# Altium PCB TSALLED.PcbDoc
Units mm, origin at the board's own origin, x right, y up, seen from the top; angles counter-clockwise.
Board outline 124.75 x 35.4 mm, 2 copper layers (Top Layer, Bottom Layer); 48 components, 39 nets, 174 pads, 7 vias.
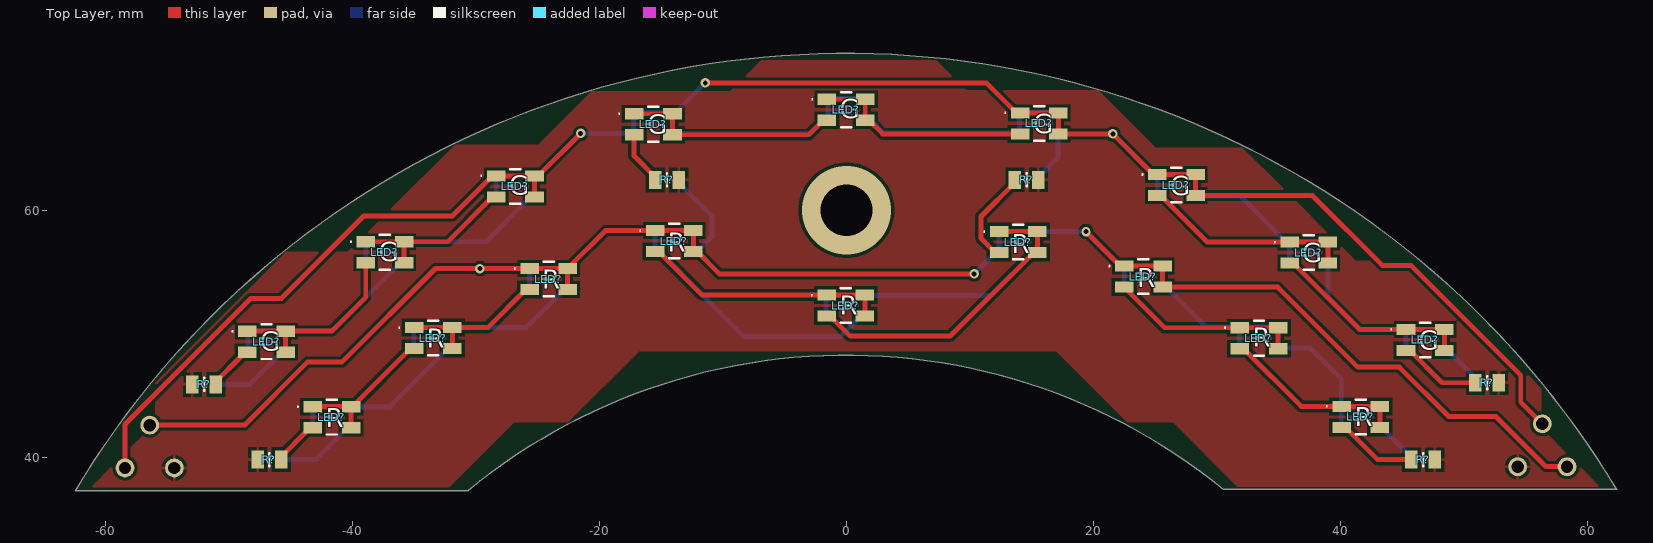
[diagram p0: Top Layer view]
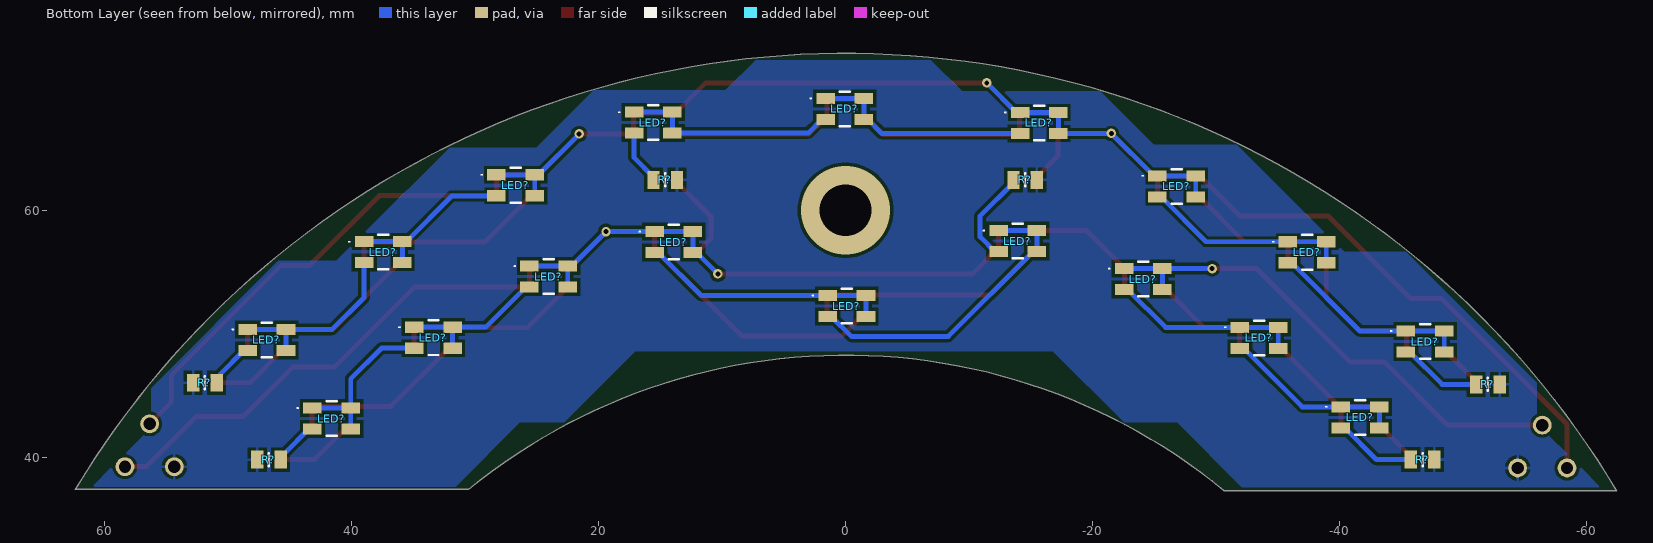
[diagram p1: Bottom Layer view, seen from below]
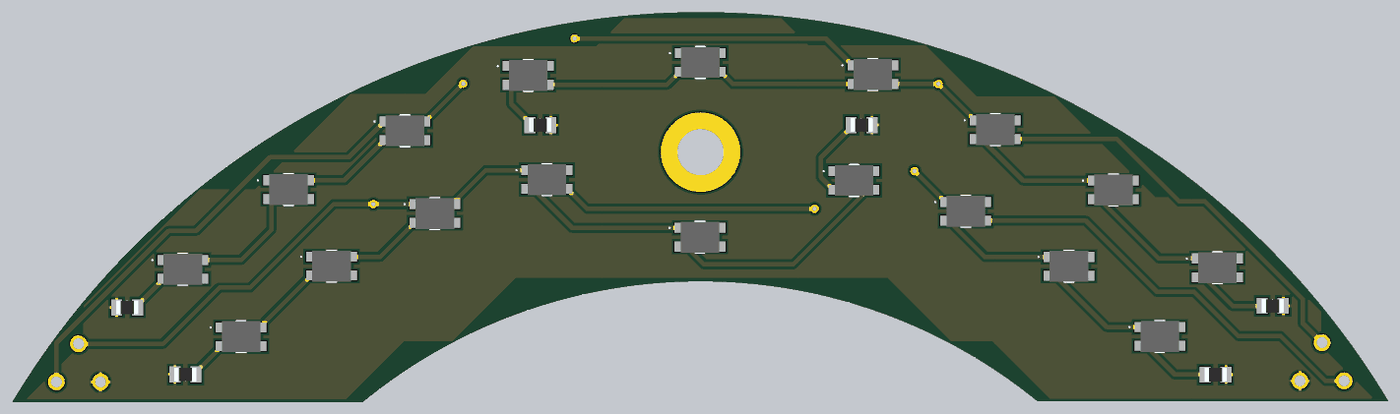
[diagram p2: 3D render of the assembled board from above, using the file's embedded part models]
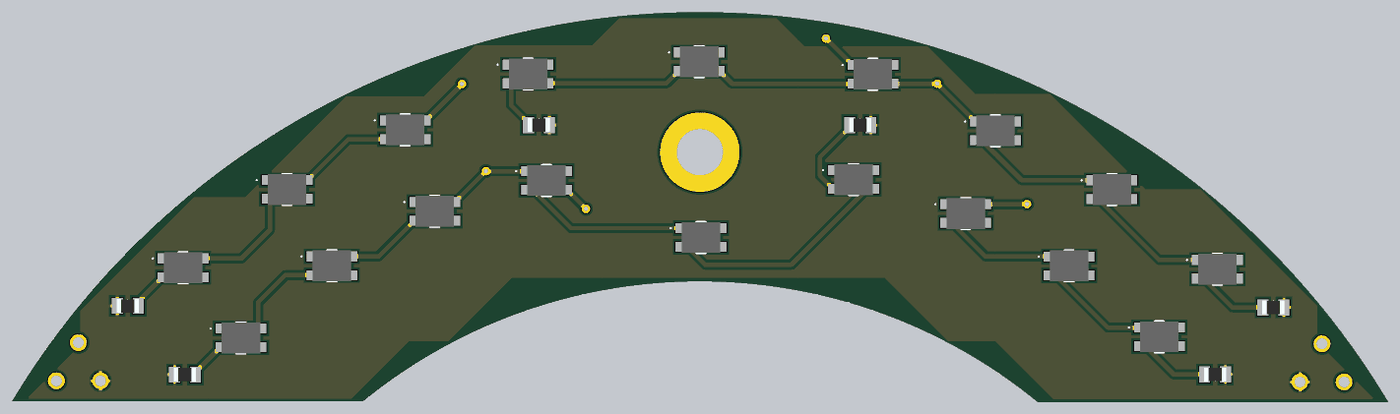
[diagram p3: 3D render of the assembled board from below, using the file's embedded part models]

## Layer stack, top to bottom
Top Solder: solder mask 0.0102, Solder Resist, Dk 3.5
Top Layer: signal copper 0.0356
Dielectric 1: dielectric 0.32, FR-4, Dk 4.8
Bottom Layer: signal copper 0.0356
Bottom Solder: solder mask 0.0102, Solder Resist, Dk 3.5

## Board outline
-62.405,37.295 cw(c0,0) 62.343,37.399 30.524,37.399 ccw(c0,0) -30.601,37.336 -30.601,37.295

## Design rules (kind name [scope] priority, off if disabled: settings)
Clearance Clearance_1 [All] p1: gap=0.254 ignorepadtopadclearanceinfootprint=FALSE except(0: Arc-Hole Track-Hole SMDPad-Hole THPad-Hole Via-Hole Fill-Hole Poly-Hole Region-Hole Text-Hole)
Clearance [All] p2: gap=0.254 ignorepadtopadclearanceinfootprint=FALSE except(0: Arc-Hole Track-Hole SMDPad-Hole THPad-Hole Via-Hole Fill-Hole Poly-Hole Region-Hole Text-Hole)
PolygonConnect [All] p1: connectstyle=Relief reliefconductorwidth=0.254 reliefentries=4 polygonreliefangle="90 Angle" airgapwidth=0.254
RoutingVias [All] p1: holewidth=0.711 width=1.27 viastyle="Through Hole" minholewidth=0.711 minwidth=1.27 maxholewidth=0.711 maxwidth=1.27
SolderMaskExpansion [All] p1: expansion=0.102 istentingtop=FALSE
Width [All] p1: maxlimit=0.4 minlimit=0.4 preferedwidth=0.4 minimp=50.000000 maximp=50.000000 favimp=50.000000
30 further rules are at their usual default settings.

## Classes and differential pairs
component class Sheet1: LED? R?

## Components (designator, comment, footprint, x,y, rotation, side; value= is the part's Value field where it differs from the comment)
LED? "150141RS63130" 150141RS63130 26.711,62.022 r270 bottom
LED? "150141RS63130" 150141RS63130 46.845,49.505 r270 bottom
LED? "150141RS63130" 150141RS63130 24.039,54.63 r270 bottom
LED? "150141RS63130" 150141RS63130 15.57,67.089 r270 bottom
LED? "150141RS63130" 150141RS63130 41.605,43.139 r270 bottom
LED? "150141RS63130" 150141RS63130 -24.097,54.43 r270 bottom
LED? "150141RS63130" 150141RS63130 -26.792,61.934 r270 bottom
LED? "150141RS63130" 150141RS63130 0.064,68.204 r270 bottom
LED? "150141RS63130" 150141RS63130 -15.674,67.066 r270 bottom
LED? "150141RS63130" 150141RS63130 -33.467,49.675 r270 bottom
LED? "150141RS63130" 150141RS63130 -46.906,49.375 r270 bottom
LED? "150141RS63130" 150141RS63130 -37.353,56.6 r270 bottom
LED? "150141RS63130" 150141RS63130 -41.646,43.236 r270 bottom
LED? "150141RS63130" 150141RS63130 -0.099,52.25 r270 bottom
LED? "150141RS63130" 150141RS63130 37.422,56.612 r270 bottom
LED? "150141RS63130" 150141RS63130 13.906,57.424 r270 bottom
LED? "150141RS63130" 150141RS63130 33.363,49.685 r270 bottom
LED? "150141RS63130" 150141RS63130 -13.931,57.507 r270 bottom
LED? "150141RS63130" 150141RS63130 -37.353,56.6 r270 top
LED? "150141RS63130" 150141RS63130 -13.931,57.507 r270 top
LED? "150141RS63130" 150141RS63130 26.711,62.038 r270 top
LED? "150141RS63130" 150141RS63130 13.906,57.424 r270 top
LED? "150141RS63130" 150141RS63130 -33.444,49.652 r270 top
LED? "150141RS63130" 150141RS63130 -0.022,68.134 r270 top
LED? "150141RS63130" 150141RS63130 -0.053,52.278 r270 top
LED? "150141RS63130" 150141RS63130 33.394,49.641 r270 top
LED? "150141RS63130" 150141RS63130 41.633,43.274 r270 top
LED? "150141RS63130" 150141RS63130 -15.625,66.96 r270 top
LED? "150141RS63130" 150141RS63130 37.421,56.567 r270 top
LED? "150141RS63130" 150141RS63130 -46.937,49.36 r270 top
LED? "150141RS63130" 150141RS63130 24.039,54.63 r270 top
LED? "150141RS63130" 150141RS63130 -41.646,43.249 r270 top
LED? "150141RS63130" 150141RS63130 -24.084,54.43 r270 top
LED? "150141RS63130" 150141RS63130 -26.795,61.934 r270 top
LED? "150141RS63130" 150141RS63130 15.611,67.031 r270 top
LED? "150141RS63130" 150141RS63130 46.845,49.505 r270 top
R? "CPF0805B100RE1" RESC2012X65N -46.695,39.822 r180 top
R? "CPF0805B100RE1" RESC2012X65N 14.587,62.459 r0 top
R? "CPF0805B100RE1" RESC2012X65N -14.519,62.456 r0 top
R? "CPF0805B100RE1" RESC2012X65N 51.859,46.04 r180 bottom
R? "CPF0805B100RE1" RESC2012X65N -51.984,45.903 r180 bottom
R? "CPF0805B100RE1" RESC2012X65N -51.984,45.903 r180 top
R? "CPF0805B100RE1" RESC2012X65N 51.859,46.04 r0 top
R? "CPF0805B100RE1" RESC2012X65N -46.695,39.822 r180 bottom
R? "CPF0805B100RE1" RESC2012X65N -14.534,62.456 r180 bottom
R? "CPF0805B100RE1" RESC2012X65N 14.597,62.459 r180 bottom
R? "CPF0805B100RE1" RESC2012X65N 46.678,39.812 r0 bottom
R? "CPF0805B100RE1" RESC2012X65N 46.678,39.812 r0 top

## Footprints (in the part's own frame and the unit in brackets; to place one, negate y for a bottom-side part, rotate by r counter-clockwise, add the part's x,y. Pads: shape width x height; smd on the part's side, far side on the other; paste and mask are expansions set on the pad)
150141RS63130 [mm]
  rect 0.9x1.5 smd: 1(-0.85,-1.55) 2(-0.85,1.55) 3(0.85,1.55) 4(0.85,-1.55)
  silkscreen extent -1.4,-2.8 1.4,0.4, body extent -1.4,-1.75 1.4,1.75, height 3.8
RESC2012X65N [mm]
  rect 1x1.45 smd: 1(-0.95,0) 2(0.95,0)
  silkscreen extent 0,-0.53 0,0.53, body extent -1,-0.63 1,0.63, height 0.65

## Part data
LED? LED? LED? LED? LED? LED? LED? LED? LED? LED? LED? LED? LED? LED? LED? LED? LED? LED? LED? LED? LED? LED? LED? LED? LED? LED? LED? LED? LED? LED? LED? LED? LED? LED? LED? LED?: "LED", Manufacturer_Name="Wurth Elektronik", Mouser Part Number=710-150141RS63130, Datasheet Link=https://www.we-online.com/components/products/datasheet/150141RS63130.pdf, Height=3.7mm, Manufacturer_Part_Number=150141RS63130, Mouser Price/Stock=https://www.mouser.co.uk/ProductDetail/Wurth-Elektronik/150141RS63130?qs=81r%252BiQLm7BRLV97EClEkBQ%3D%3D
R? R? R? R? R? R? R? R? R? R? R? R?: "Resistor", Manufacturer_Name="TE Connectivity", Mouser Part Number=279-CPF0805B100RE1, Arrow Part Number=CPF0805B100RE1, Arrow Price/Stock=https://www.arrow.com/en/products/cpf0805b100re1/te-connectivity?region=nac, Datasheet Link=https://datasheet.datasheetarchive.com/originals/distributors/DKDS-21/401696.pdf, Height=0.65mm, Manufacturer_Part_Number=CPF0805B100RE1, Mouser Price/Stock=https://www.mouser.co.uk/ProductDetail/TE-Connectivity-Holsworthy/CPF0805B100RE1?qs=9ylKvqdyudkCWLPT1QvLZQ%3D%3D

## Free pads (board coordinates)
  round 1.524 hole 1: 2(-54.392,39.142) 3(56.335,42.71) 4(54.333,39.243) G(-58.392,39.142) R(-56.389,42.609) r(58.333,39.243)

## Via types
v1: diameter 0.765, hole 0.4, Top Layer to Bottom Layer, 6 vias
v2: diameter 7.2, hole 4.2, Top Layer to Bottom Layer, 1 vias

## Nets (pads, with @x,y where several pads share a name; then routed paths per layer and width w, separated by ;. In a path a pad name is that pad's centre, name@x,y a point inside that pad or via, vN(x,y) a via of type N, cw(c..) or ccw(c..) an arc to the next point about the centre after c; other vN are vias at no path point)
0: LED?.1@48.395,50.355 LED?.2@45.295,50.355 LED?.3@45.295,48.655 LED?.4@38.972,55.762 | length 15
  Bottom Layer w0.4: LED?.4@38.972,55.762 38.972,52.933 41.55,50.355 LED?.2@45.295,50.355 ; LED?.3@45.295,48.655 LED?.2@45.295,50.355 ; LED?.1@48.395,50.355 LED?.2@45.295,50.355
1: LED?.1@38.972,57.462 LED?.2@35.872,57.462 LED?.3@35.872,55.762 LED?.4@28.261,61.172 | length 14
  Bottom Layer w0.4: LED?.4@28.217,61.172 31.862,61.172 35.572,57.462 LED?.2@35.872,57.462 ; LED?.3@35.872,55.762 LED?.2@35.872,57.462 ; LED?.1@38.972,57.462 LED?.2@35.872,57.462
2: LED?.1@43.155,43.989 LED?.2@40.055,43.989 LED?.3@40.055,42.289 LED?.4@34.913,48.835 | length 13.3
  Bottom Layer w0.4: LED?.4@34.913,48.835 37.568,48.835 40.055,46.348 LED?.2@40.055,43.989 ; LED?.3@40.055,42.289 LED?.2@40.055,43.989 ; LED?.1@43.155,43.989 LED?.2@40.055,43.989
3: LED?.1@34.913,50.535 LED?.2@31.813,50.535 LED?.3@31.813,48.835 LED?.4@25.589,53.78 | length 12.4
  Bottom Layer w0.4: LED?.4@25.589,53.78 25.889,53.78 29.134,50.535 LED?.2@31.813,50.535 ; LED?.3@31.813,48.835 LED?.2@31.813,50.535 ; LED?.1@34.913,50.535 LED?.2@31.813,50.535
6: LED?.1@17.12,67.939 LED?.2@14.02,67.939 LED?.3@14.02,66.239 LED?.4@1.613,67.354 | length 17.7
  Bottom Layer w0.4: LED?.4@1.613,67.354 1.913,67.354 3.029,66.239 14.02,66.239 14.02,67.939 LED?.1@17.12,67.939
7: LED?.1@1.613,69.054 LED?.2@-1.486,69.054 LED?.3@-1.486,67.354 LED?.4@-14.124,66.216 | length 17.9
  Bottom Layer w0.4: LED?.4@-14.124,66.216 -2.924,66.216 -1.786,67.354 -1.486,67.354 -1.486,69.054 LED?.1@1.613,69.054
8: LED?.1@-35.803,57.45 LED?.2@-38.903,57.45 LED?.3@-38.903,55.75 LED?.4@-25.242,61.084 | length 16.9
  Bottom Layer w0.4: LED?.3@-38.903,55.75 -38.903,57.45 -35.803,57.45 -29.175,57.45 -25.542,61.084 LED?.4@-25.242,61.084
9: LED?.1@-45.356,50.225 LED?.2@-48.456,50.225 LED?.3@-48.456,48.525 LED?.4@-35.803,55.75 | length 16.6
  Bottom Layer w0.4: LED?.3@-48.456,48.525 -48.456,50.225 -45.356,50.225 -41.628,50.225 -36.103,55.75 LED?.4@-35.803,55.75
10: LED?.1@-12.381,58.357 LED?.2@-15.481,58.357 LED?.3@-15.481,56.657 LED?.4@1.451,51.4 | length 25.2
  Bottom Layer w0.4: LED?.1@-12.381,58.357 -15.481,58.357 -15.481,56.657 -15.181,56.657 -8.313,49.789 -0.46,49.789 1.151,51.4 LED?.4@1.451,51.4
11: LED?.1@1.451,53.1 LED?.2@-1.649,53.1 LED?.3@-1.649,51.4 LED?.4@15.456,56.574 | length 20.2
  Bottom Layer w0.4: LED?.3@-1.649,51.4 -1.649,53.1 1.451,53.1 11.683,53.1 15.157,56.574 LED?.4@15.456,56.574
12: LED?.1@-40.096,44.086 LED?.2@-43.196,44.086 LED?.3@-43.196,42.386 LED?.4@-31.917,48.825 | length 14.9
  Bottom Layer w0.4: LED?.3@-43.196,42.386 -43.196,44.086 -40.096,44.086 -36.956,44.086 -32.217,48.825 LED?.4@-31.917,48.825
13: LED?.1@-31.917,50.525 LED?.2@-35.017,50.525 LED?.3@-35.017,48.825 LED?.4@-22.547,53.58 | length 15.4
  Bottom Layer w0.4: LED?.3@-35.017,48.825 -35.017,50.525 -31.917,50.525 -25.902,50.525 -22.847,53.58 LED?.4@-22.547,53.58
+12: pad.2 pad.4 R?.1@52.809,46.04 R?.2@13.647,62.459 R?.2@15.537,62.459 R?.2@47.628,39.812 R?.2@52.809,46.04 R?.2@-13.569,62.456 R?.2@-15.484,62.456 R?.2@-47.645,39.822 R?.2@-52.934,45.903
A: LED?.4@-43.196,42.399 R?.1@-45.745,39.822 | length 3.8
  Top Layer w0.4: R?.1@-45.745,39.822 -45.745,40.047 -43.746,42.047 -43.746,42.149 -43.496,42.399 LED?.4@-43.196,42.399
B: LED?.4@40.083,42.424 R?.1@45.728,39.812 | length 6.7
  Top Layer w0.4: LED?.4@40.083,42.424 40.383,42.424 42.995,39.812 R?.1@45.728,39.812
B1: LED?.1@-1.572,68.984 LED?.2@1.528,68.984 LED?.3@1.528,67.284 LED?.4@14.061,66.181 | length 17.8
  Top Layer w0.4: LED?.1@-1.572,68.984 1.528,68.984 1.528,67.284 1.828,67.284 2.931,66.181 LED?.4@14.061,66.181
B2: LED?.1@35.871,57.417 LED?.2@38.971,57.417 LED?.3@38.971,55.717 LED?.4@25.161,61.188 | length 17.1
  Top Layer w0.4: LED?.4@25.161,61.188 25.461,61.188 29.232,57.417 35.871,57.417 38.971,57.417 LED?.3@38.971,55.717
B3: LED?.1@-38.903,57.45 LED?.2@-35.803,57.45 LED?.3@-35.803,55.75 LED?.4@-28.345,61.084 | length 13.8
  Top Layer w0.4: LED?.1@-38.903,57.45 LED?.2@-35.803,57.45 ; LED?.3@-35.803,55.75 LED?.2@-35.803,57.45 ; LED?.4@-28.345,61.084 -28.645,61.084 -32.279,57.45 LED?.2@-35.803,57.45
B4: LED?.1@-17.175,67.81 LED?.2@-14.075,67.81 LED?.3@-14.075,66.11 LED?.4@-1.572,67.284 | length 17.8
  Top Layer w0.4: LED?.1@-17.175,67.81 -14.075,67.81 -14.075,66.11 -3.046,66.11 -1.872,67.284 LED?.4@-1.572,67.284
B6: LED?.1@45.295,50.355 LED?.2@48.395,50.355 LED?.3@48.395,48.655 LED?.4@35.871,55.717 | length 16.4
  Top Layer w0.4: LED?.4@35.871,55.717 36.171,55.717 41.533,50.355 45.295,50.355 48.395,50.355 LED?.3@48.395,48.655
B9: LED?.1@-48.487,50.21 LED?.2@-45.387,50.21 LED?.3@-45.387,48.51 LED?.4@-38.903,55.75 | length 15.2
  Top Layer w0.4: LED?.1@-48.487,50.21 LED?.2@-45.387,50.21 ; LED?.3@-45.387,48.51 LED?.2@-45.387,50.21 ; LED?.4@-38.903,55.75 -38.903,52.956 -41.649,50.21 LED?.2@-45.387,50.21
B10: LED?.1@-1.603,53.128 LED?.2@1.497,53.128 LED?.3@1.497,51.428 LED?.4@-15.481,56.657 | length 20.1
  Top Layer w0.4: LED?.4@-15.481,56.657 -15.181,56.657 -11.652,53.128 -1.603,53.128 1.497,53.128 LED?.3@1.497,51.428
B12: LED?.1@12.357,58.274 LED?.2@15.456,58.274 LED?.3@15.456,56.574 LED?.4@-1.603,51.428 | length 25.3
  Top Layer w0.4: LED?.4@-1.603,51.428 -1.303,51.428 0.316,49.809 8.392,49.809 15.157,56.574 15.456,56.574 15.456,58.274 LED?.1@12.357,58.274
B13: LED?.1@40.083,44.124 LED?.2@43.183,44.124 LED?.3@43.183,42.424 LED?.4@31.844,48.791 | length 15
  Top Layer w0.4: LED?.4@31.844,48.791 32.144,48.791 36.811,44.124 40.083,44.124 43.183,44.124 LED?.3@43.183,42.424
B14: LED?.1@31.844,50.491 LED?.2@34.944,50.491 LED?.3@34.944,48.791 LED?.4@22.489,53.78 | length 15.5
  Top Layer w0.4: LED?.4@22.489,53.78 25.778,50.491 31.844,50.491 34.944,50.491 LED?.3@34.944,48.791
B15: LED?.1@-34.994,50.502 LED?.2@-31.894,50.502 LED?.3@-31.894,48.802 LED?.4@-25.634,53.58 | length 12.3
  Top Layer w0.4: LED?.1@-34.994,50.502 LED?.2@-31.894,50.502 ; LED?.3@-31.894,48.802 LED?.2@-31.894,50.502 ; LED?.4@-25.657,53.585 -25.957,53.585 -29.04,50.502 LED?.2@-31.894,50.502
B16: LED?.1@-43.196,44.099 LED?.2@-40.096,44.099 LED?.3@-40.096,42.399 LED?.4@-34.994,48.802 | length 12
  Top Layer w0.4: LED?.1@-43.196,44.099 LED?.2@-40.096,44.099 ; LED?.3@-40.096,42.399 LED?.2@-40.096,44.099 ; LED?.4@-34.994,48.802 -35.294,48.802 -39.546,44.55 -39.546,44.349 -39.796,44.099 LED?.2@-40.096,44.099
C: LED?.4@-40.096,42.386 R?.1@-45.745,39.822 | length 6.7
  Bottom Layer w0.4: R?.1@-45.745,39.822 -42.96,39.822 -40.396,42.386 LED?.4@-40.096,42.386
D: LED?.4@43.155,42.289 R?.1@45.728,39.812 | length 3.7
  Bottom Layer w0.4: LED?.4@43.155,42.289 43.455,42.289 45.408,40.337 45.428,40.337 45.728,40.037 R?.1@45.728,39.812
E: LED?.4@-12.381,56.657 R?.1@-13.584,62.456 | length 7.7
  Bottom Layer w0.4: R?.1@-13.584,62.456 -13.584,62.231 -10.894,59.541 -10.894,57.844 -12.081,56.657 LED?.4@-12.381,56.657
G: LED?.1@14.061,67.881 LED?.1@25.161,62.888 LED?.1@28.261,62.872 LED?.1@-14.124,67.916 LED?.1@-25.242,62.784 LED?.1@-28.345,62.784 LED?.2@17.161,67.881 LED?.2@25.161,62.872 LED?.2@28.261,62.888 LED?.2@-17.224,67.916 LED?.2@-25.245,62.784 LED?.2@-28.342,62.784 LED?.3@17.161,66.181 LED?.3@25.161,61.172 LED?.3@28.261,61.188 LED?.3@-17.224,66.216 LED?.3@-25.245,61.084 LED?.3@-28.342,61.084 pad.3 pad.G | length 166.8
  Top Layer w0.4: pad.G -58.392,42.672 -48.207,52.857 -45.735,52.857 -39.063,59.53 -31.9,59.53 -28.645,62.784 -28.345,62.784 LED?.2@-25.245,62.784 ; LED?.3@-25.245,61.084 LED?.2@-25.245,62.784 ; v1(-21.51,66.216) -21.513,66.216 -24.945,62.784 LED?.2@-25.245,62.784 ; v1(-11.423,70.317) 11.324,70.317 13.761,67.881 14.061,67.881 17.161,67.881 17.161,66.181 v1(21.569,66.181) 24.861,62.888 25.161,62.888 28.261,62.888 28.261,61.188 37.73,61.188 43.401,55.517 45.712,55.517 54.585,46.645 54.585,44.461 pad.3
  Bottom Layer w0.4: LED?.3@-28.342,61.084 -28.342,62.784 -25.242,62.784 -24.942,62.784 v1(-21.51,66.216) -17.224,66.216 -17.224,67.916 -14.124,67.916 -13.824,67.916 v1(-11.423,70.317) ; v1(21.569,66.181) 21.569,66.164 24.861,62.872 LED?.2@25.161,62.872 ; LED?.3@25.161,61.172 LED?.2@25.161,62.872 ; LED?.1@28.261,62.872 LED?.2@25.161,62.872
R: LED?.1@15.456,58.274 LED?.1@22.489,55.48 LED?.1@25.589,55.48 LED?.1@-15.481,58.357 LED?.1@-22.547,55.28 LED?.1@-25.634,55.28 LED?.2@12.357,58.274 LED?.2@22.489,55.48 LED?.2@25.589,55.48 LED?.2@-12.381,58.357 LED?.2@-22.534,55.28 LED?.2@-25.647,55.28 LED?.3@12.357,56.574 LED?.3@22.489,53.78 LED?.3@25.589,53.78 LED?.3@-12.381,56.657 LED?.3@-22.534,53.58 LED?.3@-25.647,53.58 pad.R pad.r | length 154.6
  Top Layer w0.4: pad.R -48.722,42.609 -43.627,47.704 -40.833,47.704 -33.252,55.285 -29.663,55.285 v1(-29.658,55.28) -25.634,55.28 LED?.2@-22.557,55.28 ; LED?.3@-22.557,53.585 LED?.2@-22.557,55.28 ; LED?.2@-22.548,55.294 -19.485,58.357 -15.481,58.357 -12.381,58.357 -12.381,56.657 -12.081,56.657 -10.278,54.853 v1(10.336,54.853) ; LED?.2@-22.534,55.28 LED?.2@-22.557,55.28 ; v1(19.395,58.274) 22.189,55.48 25.589,55.48 25.589,53.78 34.919,53.78 41.394,47.305 44.752,47.305 48.753,43.304 52.57,43.304 56.631,39.243 pad.r
  Bottom Layer w0.4: v1(-29.658,55.28) LED?.2@-25.647,55.28 ; LED?.3@-25.647,53.58 -25.647,55.28 LED?.1@-22.547,55.28 ; v1(10.336,54.853) 12.057,56.574 12.357,56.574 12.357,58.274 15.456,58.274 v1(19.395,58.274) 22.189,55.48 LED?.2@22.489,55.48 ; LED?.3@22.489,53.78 LED?.2@22.489,55.48 ; LED?.1@25.589,55.48 LED?.2@22.489,55.48
T: LED?.4@-48.487,48.51 R?.1@-51.034,45.903 | length 3.8
  Top Layer w0.4: R?.1@-51.034,45.903 -51.034,46.128 -49.037,48.125 -49.037,48.26 -48.787,48.51 LED?.4@-48.487,48.51
U: LED?.4@45.295,48.655 R?.1@50.909,46.04 | length 6.7
  Top Layer w0.4: LED?.4@45.295,48.655 45.595,48.655 48.21,46.04 R?.1@50.909,46.04
V: LED?.4@12.357,56.574 R?.1@13.637,62.459 | length 7.8
  Top Layer w0.4: LED?.4@12.357,56.574 12.057,56.574 10.894,57.737 10.894,59.49 13.637,62.234 R?.1@13.637,62.459
W: LED?.4@-45.356,48.525 R?.1@-51.034,45.903 | length 6.8
  Bottom Layer w0.4: R?.1@-51.034,45.903 -48.278,45.903 -45.656,48.525 LED?.4@-45.356,48.525
X: LED?.4@17.12,66.239 R?.1@15.547,62.459 | length 4.4
  Bottom Layer w0.4: R?.1@15.547,62.459 15.547,62.684 17.12,64.256 LED?.4@17.12,66.239
Y: LED?.4@48.395,48.655 R?.2@50.909,46.04 | length 3.8
  Bottom Layer w0.4: LED?.4@48.395,48.655 48.695,48.655 50.609,46.741 50.609,46.34 R?.2@50.909,46.04
Z: LED?.4@-17.175,66.11 R?.1@-15.469,62.456 | length 4.4
  Top Layer w0.4: LED?.4@-17.175,66.11 -17.175,64.388 -15.469,62.681 R?.1@-15.469,62.456
copper on no net:
  other v2: 0,60

## Polygon pours and split planes (outlines as drawn)
+12 on Bottom Layer "NONET_L-01_P-001" (solid, pour order 1): -61.114,37.562 -55.946,42.73 -55.946,46.048 -45.357,56.637 -40.34,56.637 -31.676,65.301 -24.945,65.301 -20.627,69.619 -9.434,69.619 -6.901,72.151 7.29,72.151 9.736,69.705 20.399,69.705 25.029,65.075 32.05,65.075 41.227,55.898 45.905,55.898 56.19,45.613 56.19,42.421 60.975,37.635 31.572,37.635 26.386,42.822 22.794,42.822 17.026,48.59 -16.782,48.59 -22.55,42.822 -26.827,42.822 -32.068,37.581
+12 on Top Layer "NONET_L-01_P-001" (solid, pour order 2): -61.168,37.562 -55.946,42.784 -55.946,46.048 -45.357,56.637 -40.34,56.637 -31.676,65.301 -24.945,65.301 -20.627,69.619 -9.434,69.619 -6.901,72.151 7.29,72.151 9.736,69.705 20.399,69.705 25.029,65.075 32.05,65.075 41.227,55.898 45.905,55.898 56.241,45.563 56.241,42.38 60.985,37.635 31.636,37.635 26.449,42.822 22.743,42.822 16.975,48.59 -16.782,48.59 -22.55,42.822 -26.866,42.822 -32.126,37.562

## Silkscreen, mask and mechanical layers (free items; w line width, h text height)
Top Overlay:
  text "G" at -0.528,67.437 h1.52
  text "G" at 15.113,66.238 h1.52
  text "G" at -16.137,66.19 h1.52
  text "G" at -27.3,61.239 h1.52
  text "G" at 26.208,61.196 h1.52
  text "R" at -14.448,56.634 h1.52
  text "R" at 13.399,56.502 h1.52
  text "G" at -37.869,55.855 h1.52
  text "G" at 36.914,55.811 h1.52
  text "R" at 23.538,53.782 h1.52
  text "R" at -24.608,53.66 h1.52
  text "R" at -0.551,51.524 h1.52
  text "R" at 32.875,48.961 h1.52
  text "R" at -33.962,48.89 h1.52
  text "G" at 46.34,48.694 h1.52
  text "G" at -47.429,48.638 h1.52
  text "R" at 41.128,42.515 h1.52
  text "R" at -42.159,42.454 h1.52